# EAGLE board Rapid_Prototype_Schematic (EAGLE 9.6.2)

Size 160 x 100 mm. Coordinates in mm from the lower left corner, seen from the top.
Outline: 0,0 160,0 160,100 0,100 0,0
Copper layers (1*16): Top 0.035mm / dielectric 1.5mm / Bottom 0.035mm
Design rules "default": minimum track width 6mil, minimum drill 0.35mm, track to track 6mil, track to pad 6mil, pad to pad 6mil, via to via 6mil, smd to smd 6mil, copper to edge 40mil, drill to drill 6mil, minimum pad ring 10mil, minimum via ring 8mil, stop-mask expansion 4mil, vias tented up to drill 0mil, thermal gap 10mil

## Footprints (pad centres in the part's own frame; a part is rotated, then mirrored left to right if it is on the bottom)
MEGAOUTLINE = drill 0.8: 0 12.7,24.13; 1 10.16,24.13; 2 7.62,24.13; 3 5.08,24.13; 3V3 -15.24,-24.13; 4 2.54,24.13; 5 0,24.13; 5V -12.7,-24.13; 6 -2.54,24.13; 7 -5.08,24.13; 8 -8.89,24.13; 9 -11.43,24.13; 10 -13.97,24.13; 11 -16.51,24.13; 12 -19.05,24.13; 13 -21.59,24.13; 14 17.78,24.13; 15 20.32,24.13; 16 22.86,24.13; 17 25.4,24.13; 18 27.94,24.13; 19 30.48,24.13; 20 33.02,24.13; 21 35.56,24.13; 22 43.18,21.59; 23 45.72,21.59; 24 43.18,19.05; 25 45.72,19.05; 26 43.18,16.51; 27 45.72,16.51; 28 43.18,13.97; 29 45.72,13.97; 30 43.18,11.43; 31 45.72,11.43; 32 43.18,8.89; 33 45.72,8.89; 34 43.18,6.35; 35 45.72,6.35; 36 43.18,3.81; 37 45.72,3.81; 38 43.18,1.27; 39 45.72,1.27; 40 43.18,-1.27; 41 45.72,-1.27; 42 43.18,-3.81; 43 45.72,-3.81; 44 43.18,-6.35; 45 45.72,-6.35; 46 43.18,-8.89; 47 45.72,-8.89; 48 43.18,-11.43; 49 45.72,-11.43; 50 43.18,-13.97; 51 45.72,-13.97; 52 43.18,-16.51; 53 45.72,-16.51; A0 0,-24.13; A1 2.54,-24.13; A2 5.08,-24.13; A3 7.62,-24.13; A4 10.16,-24.13; A5 12.7,-24.13; A6 15.24,-24.13; A7 17.78,-24.13; A8 22.86,-24.13; A9 25.4,-24.13; A10 27.94,-24.13; A11 30.48,-24.13; A12 33.02,-24.13; A13 35.56,-24.13; A14 38.1,-24.13; A15 40.64,-24.13; AREF -26.67,24.13; GND@1 -24.13,24.13; GND@2 -10.16,-24.13; GND@3 -7.62,-24.13; GND@4 43.18,24.13; GND@5 45.72,24.13; GND@6 43.18,-19.05; GND@7 45.72,-19.05; RESET -17.78,-24.13; VIN -5.08,-24.13
C0603 = smd 1.1 x 1: 1 -0.85,0; 2 0.85,0
C0805 = smd 1.3 x 1.5: 1 -0.85,0; 2 0.85,0
C050-050X075 = drill 0.813 octagon: 1 -2.54,0; 2 2.54,0
C1206 = smd 1.6 x 1.8: 1 -1.4,0; 2 1.4,0
SOD523-M = smd 0.605 x 0.452: 1 -0.852,0; 2 0.852,0
SMASERIES-M = smd 2.565 x 1.651: 1 -1.613,0; 2 1.613,0
DPAK229P990X238-3N = smd 0.97 x 2.83: 1 -2.29,-4.14; 3 2.29,-4.14 | smd 5.63 x 6.09: 4 0,2.51
BOURNS_INC._SMAJ15A_0 = smd 1.27 x 2.1: 1 -1.985,0; 2 1.985,0
DIOM7958X256N = smd 2 x 3.05: 1 -3.6,0; 2 3.6,0
SOD2512X110N = smd 1.03 x 0.52: A 1.15,0; C -1.15,0
FUSM1812X02 = smd 1.9 x 3.4: 1 -1.95,0; 2 1.95,0
SOIC127P600X175-8N = smd 1.525 x 0.7: 1 -2.712,1.905; 2 -2.712,0.635; 3 -2.712,-0.635; 4 -2.712,-1.905; 5 2.712,-1.905; 6 2.712,-0.635; 7 2.712,0.635; 8 2.712,1.905
1X03-CLEANBIG = drill 1.016 pad 1.676: 1 -2.54,0; 2 0,0; 3 2.54,0
CHIPLED_0805 = smd 1.2 x 1.2: A 0,-1.05; C 0,1.05
SOP254P1016X460-4N = smd 2.1 x 1.45: 1 -4.55,1.27; 2 -4.55,-1.27; 3 4.55,-1.27; 4 4.55,1.27
DESD6V8DLP7 = smd 0.4 x 0.25: 1 -0.1,0.225; 2 -0.1,-0.225 | smd 0.4 x 0.7: 3 0.6,0
M0805 = smd 1.3 x 1.6: 1 -0.95,0; 2 0.95,0
R0805 = smd 1.1 x 1.4: 1 -1,0; 2 1,0
R0603 = smd 1 x 1.1: 1 -0.85,0; 2 0.85,0
R1206 = smd 1.6 x 1.803: 1 -1.422,0; 2 1.422,0
MA03-2 = drill 1.016: 1 -2.54,-1.27 | drill 1.016 octagon: 2 -2.54,1.27; 3 0,-1.27; 4 0,1.27; 5 2.54,-1.27; 6 2.54,1.27
MA06-1 = drill 1.016 long: 1 -6.35,0; 2 -3.81,0; 3 -1.27,0; 4 1.27,0; 5 3.81,0; 6 6.35,0
MA04-1 = drill 1.016 long: 1 -3.81,0; 2 -1.27,0; 3 1.27,0; 4 3.81,0
M08A = smd 1.981 x 0.559: 1 -2.464,1.905; 2 -2.464,0.635; 3 -2.464,-0.635; 4 -2.464,-1.905; 5 2.464,-1.905; 6 2.464,-0.635; 7 2.464,0.635; 8 2.464,1.905
TPA08AAA = smd 0.152 x 0.152: A1 -0.5,-0.5; A2 0,-0.5; A3 0.5,0.5; B1 -0.5,0; B3 0,0.5; C1 0.5,0; C2 0.5,-0.5; C3 -0.5,0.5
DCY4 = smd 0.889 x 1.765: 1 -2.311,-3.118; 2 0,-3.118; 3 2.311,-3.118 | smd 3.15 x 1.765: 4 0,3.118
SO-8_S = smd 1.981 x 0.533: 1 -2.464,1.905; 2 -2.464,0.635; 3 -2.464,-0.635; 4 -2.464,-1.905; 5 2.464,-1.905; 6 2.464,-0.635; 7 2.464,0.635; 8 2.464,1.905

## Placement (x,y rotation side)
$2_3_$_2020-06-04_21-52-10  MEGA_DEVICE  [MEGAOUTLINE]  -64.77,27.94 0 top  (outside the outline)
C1  0.1µF  [C0603]  -100.33,116.84 0 top  (outside the outline)
C2  0.1µF  [C0603]  -106.68,116.84 0 top  (outside the outline)
C3  1µF  [C0805]  -121.92,97.79 0 top  (outside the outline)
C4  1µF  [C0805]  -16.51,104.14 0 top  (outside the outline)
C5  1µF  [C0805]  -21.59,104.14 0 top  (outside the outline)
C6  1µF  [C0805]  -26.67,104.14 0 top  (outside the outline)
C7  220µF  [C050-050X075]  -118.11,58.42 0 top  (outside the outline)
C8  220µF  [C050-050X075]  -16.51,74.93 0 top  (outside the outline)
C9  220µF  [C050-050X075]  -25.4,74.93 0 top  (outside the outline)
C10  220µF  [C050-050X075]  -34.29,74.93 0 top  (outside the outline)
C11  100nF  [C0603]  -81.28,116.84 0 top  (outside the outline)
C12  0.1µF  [C0603]  -113.03,116.84 0 top  (outside the outline)
C13  1uF  [C0805]  -40.64,97.79 0 top  (outside the outline)
C14  1µF  [C0805]  -45.72,97.79 0 top  (outside the outline)
C15  1µF  [C0805]  -50.8,97.79 0 top  (outside the outline)
C16  220µF  [C050-050X075]  -43.18,74.93 0 top  (outside the outline)
C17  220uF  [C050-050X075]  -52.07,74.93 0 top  (outside the outline)
C18  220µF  [C050-050X075]  -60.96,74.93 0 top  (outside the outline)
C19  1µF  [C0805]  -55.88,97.79 0 top  (outside the outline)
C20  0.1µF  [C0603]  -119.38,116.84 0 top  (outside the outline)
C21  1µF  [C0603]  -34.29,123.19 0 top  (outside the outline)
C22  1µF  [C0603]  -39.37,123.19 0 top  (outside the outline)
C23  0.1µF  [C0603]  -17.78,123.19 0 top  (outside the outline)
C24  1µF  [C0805]  -60.96,97.79 0 top  (outside the outline)
C25  1µF  [C0805]  -66.04,97.79 0 top  (outside the outline)
C26  1µF  [C0805]  -71.12,97.79 0 top  (outside the outline)
C27  220µF  [C050-050X075]  -69.85,74.93 0 top  (outside the outline)
C28  220µF  [C050-050X075]  -78.74,74.93 0 top  (outside the outline)
C29  22uF  [C1206]  -73.66,91.44 0 top  (outside the outline)
C30  100nf  [C0603]  -24.13,123.19 0 top  (outside the outline)
C31  1.5nf  [C1206]  -80.01,91.44 0 top  (outside the outline)
C32  270nf  [C0603]  -93.98,116.84 0 top  (outside the outline)
C33  10uf  [C0603]  -29.21,123.19 0 top  (outside the outline)
C34  0.1 mf  [C0603]  -87.63,116.84 0 top  (outside the outline)
C35  1µF  [C0805]  -76.2,97.79 0 top  (outside the outline)
C36  1µF  [C0805]  -81.28,97.79 0 top  (outside the outline)
C37  1µF  [C0805]  -86.36,97.79 0 top  (outside the outline)
C38  1µF  [C0805]  -91.44,97.79 0 top  (outside the outline)
C39  1µF  [C0805]  -96.52,97.79 0 top  (outside the outline)
C40  1µF  [C0805]  -101.6,97.79 0 top  (outside the outline)
C41  1µF  [C0805]  -106.68,97.79 0 top  (outside the outline)
CR1  BZT585B16T-7SOD523-M  [SOD523-M]  -99.06,121.92 0 top  (outside the outline)
CR2  16.18V 2%  [SOD523-M]  -105.41,121.92 0 top  (outside the outline)
CR3  SMAJ18ASMASERIES-M  [SMASERIES-M]  -92.71,121.92 0 top  (outside the outline)
CR4  BZT585B16T-7SOD523-M  [SOD523-M]  -111.76,121.92 0 top  (outside the outline)
CR5  16.18V 2%  [SOD523-M]  -118.11,121.92 0 top  (outside the outline)
CR6  16.18V 2%  [SOD523-M]  -15.24,127 0 top  (outside the outline)
CR7  16.18V 2%  [SOD523-M]  -21.59,127 0 top  (outside the outline)
CR8  16.18V 2%  [SOD523-M]  -27.94,127 0 top  (outside the outline)
CR9  16.18V 2%  [SOD523-M]  -34.29,127 0 top  (outside the outline)
D1  MBRD835L  [DPAK229P990X238-3N]  -19.05,63.5 0 top  (outside the outline)
D2  MBRD835L  [DPAK229P990X238-3N]  -30.48,63.5 0 top  (outside the outline)
D3  BOURNS_INC._SMAJ15ABOURNS_INC._SMAJ15A_0_0  [BOURNS_INC._SMAJ15A_0]  -76.2,121.92 0 top  (outside the outline)
D4  MBRS330T3G  [DIOM7958X256N]  -105.41,83.82 0 top  (outside the outline)
D5  CMDSH-3TR  [SOD2512X110N]  -52.07,104.14 0 top  (outside the outline)
F1  MF-MSMF050-2  [FUSM1812X02]  -77.47,59.69 0 top  (outside the outline)
IC1  SI4459ADY-T1-GE3  [SOIC127P600X175-8N]  -120.65,-3.81 0 top  (outside the outline)
IC2  SI4459ADY-T1-GE3  [SOIC127P600X175-8N]  -124.46,-10.16 0 top  (outside the outline)
IC3  SI4459ADY-T1-GE3  [SOIC127P600X175-8N]  -128.27,-16.51 0 top  (outside the outline)
IC4  SI4459ADY-T1-GE3  [SOIC127P600X175-8N]  -132.08,-22.86 0 top  (outside the outline)
IC5  SI4459ADY-T1-GE3  [SOIC127P600X175-8N]  -135.89,-29.21 0 top  (outside the outline)
IC6  SI4459ADY-T1-GE3  [SOIC127P600X175-8N]  -139.7,-35.56 0 top  (outside the outline)
IC7  SI4459ADY-T1-GE3  [SOIC127P600X175-8N]  -143.51,-41.91 0 top  (outside the outline)
IC8  SI4459ADY-T1-GE3  [SOIC127P600X175-8N]  -147.32,-48.26 0 top  (outside the outline)
JP1  J11  [1X03-CLEANBIG]  -83.82,120.65 0 top  (outside the outline)
LED1  YELLOW  [CHIPLED_0805]  -83.82,57.15 0 top  (outside the outline)
LED2  YELLOW  [CHIPLED_0805]  -90.17,57.15 0 top  (outside the outline)
LED3  GREEN  [CHIPLED_0805]  -86.36,73.66 0 top  (outside the outline)
LED4  GREEN  [CHIPLED_0805]  -92.71,73.66 0 top  (outside the outline)
Q1  LTV-8141S  [SOP254P1016X460-4N]  -88.9,90.17 0 top  (outside the outline)
Q3  DMN65D8LFB-7  [DESD6V8DLP7]  -45.72,127 0 top  (outside the outline)
Q5  DMN65D8LFB-7  [DESD6V8DLP7]  -60.96,127 0 top  (outside the outline)
Q7  DMN65D8LFB-7  [DESD6V8DLP7]  -76.2,127 0 top  (outside the outline)
Q9  DMN65D8LFB-7  [DESD6V8DLP7]  -91.44,127 0 top  (outside the outline)
Q11  DMN65D8LFB-7  [DESD6V8DLP7]  -106.68,127 0 top  (outside the outline)
Q13  DMN65D8LFB-7  [DESD6V8DLP7]  -20.32,129.54 0 top  (outside the outline)
Q15  DMN65D8LFB-7  [DESD6V8DLP7]  -35.56,129.54 0 top  (outside the outline)
R1  1MΩ  [M0805]  -16.51,97.79 0 top  (outside the outline)
R2  1MΩ  [M0805]  -22.86,97.79 0 top  (outside the outline)
R3  330  [R0805]  -31.75,104.14 0 top  (outside the outline)
R4  1MΩ  [M0805]  -29.21,97.79 0 top  (outside the outline)
R5  330  [R0805]  -36.83,104.14 0 top  (outside the outline)
R6  330  [R0805]  -41.91,104.14 0 top  (outside the outline)
R7  3.3k  [R0603]  -54.61,110.49 0 top  (outside the outline)
R8  3.3k  [R0603]  -59.69,110.49 0 top  (outside the outline)
R9  3.3k  [R0603]  -64.77,110.49 0 top  (outside the outline)
R10  3.3k  [R0603]  -69.85,110.49 0 top  (outside the outline)
R11  0.005  [R1206]  -35.56,91.44 0 top  (outside the outline)
R12  0.005  [R1206]  -41.91,91.44 0 top  (outside the outline)
R13  0.005  [R1206]  -48.26,91.44 0 top  (outside the outline)
R14  0.005  [R1206]  -54.61,91.44 0 top  (outside the outline)
R15  3.3k  [R0603]  -74.93,110.49 0 top  (outside the outline)
R16  3.3k  [R0603]  -80.01,110.49 0 top  (outside the outline)
R17  3.3k  [R0603]  -85.09,110.49 0 top  (outside the outline)
R18  0.005  [R1206]  -60.96,91.44 0 top  (outside the outline)
R19  0.010Ω  [R1206]  -29.21,91.44 0 top  (outside the outline)
R20  0.005  [R1206]  -67.31,91.44 0 top  (outside the outline)
R21  10k Ω 1%  [M0805]  -114.3,90.17 0 top  (outside the outline)
R22  30.1kΩ 1%  [M0805]  -104.14,90.17 0 top  (outside the outline)
R23  3.3kΩ 1%  [R0603]  -62.23,104.14 0 top  (outside the outline)
R24  3.3kΩ 1%  [R0603]  -72.39,104.14 0 top  (outside the outline)
R25  0.005Ω 1%  [R1206]  -120.65,83.82 0 top  (outside the outline)
R26  0.005Ω 1%  [R1206]  -21.59,91.44 0 top  (outside the outline)
R27  1k Ω  [M0805]  -35.56,97.79 0 top  (outside the outline)
R28  18k  [M0805]  -111.76,97.79 0 top  (outside the outline)
R29  30.1k  [M0805]  -120.65,90.17 0 top  (outside the outline)
R30  1k  [M0805]  -116.84,97.79 0 top  (outside the outline)
R31  10kΩ  [R0603]  -78.74,104.14 0 top  (outside the outline)
R32  1kΩ  [R0603]  -90.17,110.49 0 top  (outside the outline)
R33  10kΩ  [R0603]  -85.09,104.14 0 top  (outside the outline)
R34  1kΩ  [R0603]  -95.25,110.49 0 top  (outside the outline)
R35  10kΩ  [R0603]  -91.44,104.14 0 top  (outside the outline)
R36  1kΩ  [R0603]  -100.33,110.49 0 top  (outside the outline)
R37  10kΩ  [R0603]  -97.79,104.14 0 top  (outside the outline)
R38  1k  [R0603]  -105.41,110.49 0 top  (outside the outline)
R39  10kΩ  [R0603]  -104.14,104.14 0 top  (outside the outline)
R40  1kΩ  [R0603]  -110.49,110.49 0 top  (outside the outline)
R41  10kΩ  [R0603]  -110.49,104.14 0 top  (outside the outline)
R42  1kΩ  [R0603]  -115.57,110.49 0 top  (outside the outline)
R43  10kΩ  [R0603]  -116.84,104.14 0 top  (outside the outline)
R44  1kΩ  [R0603]  -120.65,110.49 0 top  (outside the outline)
R45  10kΩ  [R0603]  -123.19,104.14 0 top  (outside the outline)
R46  1kΩ  [R0603]  -16.51,116.84 0 top  (outside the outline)
R47  10kΩ  [R0603]  -17.78,110.49 0 top  (outside the outline)
R48  1kΩ  [R0603]  -21.59,116.84 0 top  (outside the outline)
R49  10kΩ  [R0603]  -24.13,110.49 0 top  (outside the outline)
R50  1kΩ  [R0603]  -26.67,116.84 0 top  (outside the outline)
R51  10kΩ  [R0603]  -30.48,110.49 0 top  (outside the outline)
R52  1kΩ  [R0603]  -31.75,116.84 0 top  (outside the outline)
R53  10kΩ  [R0603]  -36.83,110.49 0 top  (outside the outline)
R54  1kΩ  [R0603]  -36.83,116.84 0 top  (outside the outline)
R55  10kΩ  [R0603]  -43.18,110.49 0 top  (outside the outline)
R56  1kΩ  [R0603]  -41.91,116.84 0 top  (outside the outline)
R57  10kΩ  [R0603]  -49.53,110.49 0 top  (outside the outline)
R58  1kΩ  [R0603]  -46.99,116.84 0 top  (outside the outline)
SV1  J1  [MA03-2]  -40.64,59.69 0 top  (outside the outline)
SV2  J2  [MA06-1]  -104.14,76.2 0 top  (outside the outline)
SV3  J3  [MA06-1]  -21.59,83.82 0 top  (outside the outline)
SV4  J4  [MA03-2]  -50.8,59.69 0 top  (outside the outline)
SV5  J5  [MA03-2]  -60.96,59.69 0 top  (outside the outline)
SV6  J6  [MA04-1]  -55.88,115.57 0 top  (outside the outline)
SV7  J7  [MA06-1]  -38.1,83.82 0 top  (outside the outline)
SV8  J8  [MA04-1]  -69.85,115.57 0 top  (outside the outline)
SV9  J9  [MA06-1]  -54.61,83.82 0 top  (outside the outline)
SV10  J10  [MA06-1]  -71.12,83.82 0 top  (outside the outline)
U1  LM35DM  [M08A]  -86.36,82.55 0 top  (outside the outline)
U2  LM2904ITPX/NOPB  [TPA08AAA]  -43.18,121.92 0 top  (outside the outline)
U3  LM2904ITPX/NOPB  [TPA08AAA]  -49.53,121.92 0 top  (outside the outline)
U4  LM2904ITPX/NOPB  [TPA08AAA]  -55.88,121.92 0 top  (outside the outline)
U5  LM2904ITPX/NOPB  [TPA08AAA]  -62.23,121.92 0 top  (outside the outline)
U6  LM2904ITPX/NOPB  [TPA08AAA]  -68.58,121.92 0 top  (outside the outline)
U7  TLV1117LV33DCYR  [DCY4]  -109.22,59.69 0 top  (outside the outline)
U8  LT1374IS8-5PBF  [SO-8_S]  -93.98,83.82 0 top  (outside the outline)

## Library data of the parts
$2_3_$_2020-06-04_21-52-10 = ArduinoMegaOutline
C1-C41 JP1 LED1-LED4 R1-R58 = adafruit
CR1 CR2 CR4-CR9 = Diode1; MANUFACTURER_PART_NUMBER: BZT585B16T7; VENDOR: Diodes Inc
CR3 = Diode2; MANUFACTURER_PART_NUMBER: SMAJ18A; VENDOR: Littelfuse Inc
D1 D2 = MBRD835L; AVAILABILITY: Unavailable; DESCRIPTION: Diode Schottky 35V 8A Surface Mount DPAK; MF: Diodes Inc.; MP: MBRD835L-T; PACKAGE: TO-252 Diodes Inc.; PRICE: None
D3 = Bourns Inc. - SMAJ15A; AUTOMOTIVE: No; BREAKDOWN_VOLTAGE: 16.7V; CENTROID_NOT_SPECIFIED: No; CLAMPING_VOLTAGE: 24.4V; DATASHEET: https://www.bourns.com/docs/Product-Datasheets/SMAJ.pdf; DEVICE_CLASS_L1: Circuit Protection; DEVICE_CLASS_L2: TVS Diodes; DEVICE_CLASS_L3: unset; DIGIKEY_DESCRIPTION: DIODE TVS DIODE 15V 24.4V SMA; DIGIKEY_PART_NUMBER: SMAJ15ABCT-ND; DIRECTION: Unidirectional; FOOTPRINT_VARIANT_NAME_0: Recommended_Land_Pattern; HEIGHT: 2.29mm; LEAD_FREE: Yes; MAX_JUNCTION_TEMP: +150°C; MF: Bourns Inc.; MFG_PACKAGE_IDENT: SMA; MFG_PACKAGE_IDENT_COMPONENT_ID: c691c3592a14e60a; MFG_PACKAGE_IDENT_DATE: 0; MFG_PACKAGE_IDENT_REV: 0; MOUSER_DESCRIPTION: Bourns Smaj15a / Diode Tvs 15v 400w Uni 5% Smd Bourns; MOUSER_PART_NUMBER: 652-SMAJ15A; MPN: SMAJ15A; NUMBER_OF_CHANNELS: 1; PACKAGE: SMA; PEAK_PULSE_CURRENT: 16.4A; PEAK_PULSE_POWER: 400W; PREFIX: D; REVERSE_STANDOFF_VOLTAGE: 15V; ROHS: Yes; TEMPERATURE_RANGE_HIGH: +150°C; TEMPERATURE_RANGE_LOW: -55°C; VERIFICATION_VERSION: 0.0.0.3
D4 = MBRS330T3G; HEIGHT: 2.56mm; MANUFACTURER_NAME: ON Semiconductor; MANUFACTURER_PART_NUMBER: MBRS330T3G; MOUSER_PART_NUMBER: 863-MBRS330T3G; MOUSER_PRICE-STOCK: https://www.mouser.com/Search/Refine.aspx?Keyword=863-MBRS330T3G
D5 = CMDSH-3TR; AVAILABILITY: Unavailable; DESCRIPTION: Diode Schottky 30V 100mA Surface Mount SOD-323; MF: Central Semiconductor; MP: CMDSH-3 TR; PACKAGE: SOD-323 Central Semiconductor; PRICE: None
F1 = MF-MSMF050-2; AVAILABILITY: Unavailable; DESCRIPTION: Polymeric PTC Resettable Fuse 15V 500mA Ih Surface Mount 1812 _4532 Metric_, Concave; MF: Bourns; MP: MF-MSMF050-2; PACKAGE: 1812 Bourns; PRICE: None
IC1-IC8 = SI4459ADY-T1-GE3; DESCRIPTION: Trans MOSFET P-CH 30V 29A 8-Pin SOIC N T/R; HEIGHT: 1.75mm; MANUFACTURER_NAME: Vishay; MANUFACTURER_PART_NUMBER: SI4459ADY-T1-GE3; MOUSER_PART_NUMBER: 781-SI4459ADY-T1-GE3; MOUSER_PRICE-STOCK: https://www.mouser.co.uk/ProductDetail/Vishay-Semiconductors/SI4459ADY-T1-GE3?qs=IRuQNBqMOcnyBuDcl66N0Q%3D%3D
Q1 = LTV-8141S; DESCRIPTION: Transistor Output Optocouplers Optocoupler AC input; HEIGHT: 4.6mm; MANUFACTURER_NAME: Lite-On; MANUFACTURER_PART_NUMBER: LTV-8141S; MOUSER_PART_NUMBER: 859-LTV-8141S; MOUSER_PRICE-STOCK: https://www.mouser.co.uk/ProductDetail/Lite-On/LTV-8141S?qs=9PJrLaO2oWUf6ygS0H3swQ%3D%3D
Q3 Q5 Q7 Q9 Q11 Q13 Q15 = DMN65D8LFB-7; DESCRIPTION: MOSFET 60V N-Ch Dual Enh 20Vgss 300mW Pd; HEIGHT: 0.53mm; MANUFACTURER_NAME: Diodes Inc.; MANUFACTURER_PART_NUMBER: DMN65D8LFB-7; MOUSER_PART_NUMBER: 621-DMN65D8LFB-7; MOUSER_PRICE-STOCK: https://www.mouser.com/Search/Refine.aspx?Keyword=621-DMN65D8LFB-7
SV1-SV10 = con-lstb; OC_FARNELL: unknown; OC_NEWARK: unknown
U1 = LM35DM; BUILT_BY: EMA_UL_Team; MANUFACTURER_PART_NUMBER: LM35DM; VENDOR: Texas Instruments
U2-U6 = Opamp1; MANUFACTURER_PART_NUMBER: LM2904ITPXNOPB; VENDOR: Texas Instruments
U7 = TLV1117LV33DCYR; BUILT_BY: EMA_UL_Team; MANUFACTURER: Texas Instruments; MANUFACTURER_PART_NUMBER: TLV1117LV33DCYR; VENDOR: Texas Instruments
U8 = LT1374IS8-5PBF; AVAILABILITY: Unavailable; DESCRIPTION: Buck, SEPIC Switching Regulator IC Positive Fixed 5V 1 Output 4.5A _Switch_ 8-SOIC _0.154, 3.90mm Width_; MF: Linear Technology; MP: LT1374IS8-5#PBF; PACKAGE: SO-8 Linear Technology; PRICE: None

## Nets
5V: C1.1 C2.1 C11.1 C12.1 C23.1 C34.1 CR1.1 D5.A IC8.1 IC8.2 IC8.3 IC8.5 IC8.6 IC8.7 IC8.8 R1.2 R2.2 R4.2 R29.2 U1.8 U2.A2 U3.A2 U4.A2 U5.A2 U6.A2 U8.3 U8.5
+3V3: C26.1 LED2.A SV5.5 SV5.6 U7.2 U7.4
+5V: C19.1 R27.2 SV6.4 SV8.4 U7.3
BATT_VOLTAGE: $2_3_$_2020-06-04_21-52-10.A8 C20.1 R21.2 R22.1
BTMP: $2_3_$_2020-06-04_21-52-10.A10 U1.1
COMBINED_POWER: C27.1 C28.1 C36.1 CR3.1 CR4.1 IC2.1 IC2.2 IC2.3 R25.2 R26.2 R35.2 U6.B1 U6.B3
CTLD_ELEC_PWR: R19.1 R22.2 U4.C3
ELEC_CURR: $2_3_$_2020-06-04_21-52-10.A9 C13.1 R15.1
ESC_MAIN_POWER_SW: $2_3_$_2020-06-04_21-52-10.31 R36.1
ESC_PA_POWER: C9.1 C35.1 CR2.1 IC7.1 IC7.2 IC7.3 R13.2 R31.2 U2.B3
ESC_PF_POWER: C18.1 C40.1 CR8.1 IC3.1 IC3.2 IC3.3 R20.2 R51.2 U5.B3
ESC_POWER: IC2.5 IC2.6 IC2.7 IC2.8 R11.1 R12.1 R13.1 R14.1 R18.1 R20.1 U2.C1 U2.C3 U3.C1 U3.C3 U5.C1 U5.C3
ESC_POWER1: D1.4 D2.4 R25.1 R26.1 U6.C1 U6.C3
ESC_PV_POWER: C10.1 C39.1 CR7.1 IC5.1 IC5.2 IC5.3 R14.2 R47.2 U3.B3
ESC_SA_POWER: C7.1 C41.1 CR9.1 IC4.1 IC4.2 IC4.3 R11.2 R55.2 U2.B1
ESC_SF_POWER: C16.1 C38.1 CR6.1 IC1.1 IC1.2 IC1.3 R18.2 R43.2 U5.B1
ESC_SV_POWER: C8.1 C37.1 CR5.1 IC6.1 IC6.2 IC6.3 R12.2 R39.2 U3.B1
ESCPA_CURR: $2_3_$_2020-06-04_21-52-10.A4 C3.1 R7.1
ESCPA_POWER: IC7.5 IC7.6 IC7.7 IC7.8 SV3.5
ESCPA_PWM: $2_3_$_2020-06-04_21-52-10.12 SV10.1
ESCPA_SWITCH: $2_3_$_2020-06-04_21-52-10.33 R32.1
ESCPF_CURR: $2_3_$_2020-06-04_21-52-10.A2 C14.1 R16.1
ESCPF_POWER: IC3.5 IC3.6 IC3.7 IC3.8 SV3.3
ESCPF_PWM: $2_3_$_2020-06-04_21-52-10.8 SV10.4
ESCPF_SWITCH: $2_3_$_2020-06-04_21-52-10.35 R52.1
ESCPV_CURR: $2_3_$_2020-06-04_21-52-10.A0 C4.1 R8.1
ESCPV_POWER: IC5.5 IC5.6 IC5.7 IC5.8 SV3.4
ESCPV_PWM: $2_3_$_2020-06-04_21-52-10.6 SV10.6
ESCPV_SWITCH: $2_3_$_2020-06-04_21-52-10.34 $2_3_$_2020-06-04_21-52-10.37 R48.1
ESCSA_CURR: $2_3_$_2020-06-04_21-52-10.A5 C5.1 R9.1
ESCSA_POWER: IC4.5 IC4.6 IC4.7 IC4.8 SV3.6
ESCSA_PWM: $2_3_$_2020-06-04_21-52-10.9 SV10.3
ESCSA_SWITCH: $2_3_$_2020-06-04_21-52-10.32 R56.1
ESCSF_CURR: $2_3_$_2020-06-04_21-52-10.A3 C15.1 R17.1
ESCSF_POWER: SV3.1
ESCSF_PWM: $2_3_$_2020-06-04_21-52-10.11 SV10.2
ESCSF_SWITCH: R44.1
ESCSV_CURR: $2_3_$_2020-06-04_21-52-10.A1 C6.1 R10.1
ESCSV_POWER: IC6.5 IC6.6 IC6.7 IC6.8 SV3.2
ESCSV_PWM: $2_3_$_2020-06-04_21-52-10.7 SV10.5
ESCSV_SWITCH: $2_3_$_2020-06-04_21-52-10.36 R40.1
GND: $2_3_$_2020-06-04_21-52-10.GND@1 $2_3_$_2020-06-04_21-52-10.GND@2 $2_3_$_2020-06-04_21-52-10.GND@3 $2_3_$_2020-06-04_21-52-10.GND@4 $2_3_$_2020-06-04_21-52-10.GND@5 $2_3_$_2020-06-04_21-52-10.GND@6 $2_3_$_2020-06-04_21-52-10.GND@7 C1.2 C2.2 C3.2 C4.2 C5.2 C6.2 C7.2 C8.2 C9.2 C10.2 C11.2 C12.2 C13.2 C14.2 C15.2 C16.2 C17.2 C18.2 C19.2 C20.2 C21.2 C22.2 C23.2 C24.2 C25.2 C26.2 C27.2 C28.2 C29.2 C31.2 C33.2 C34.2 CR3.2 D3.2 D4.2 LED1.C LED3.C LED4.C Q1.3 Q3.2 Q5.2 Q7.2 Q9.2 Q11.2 Q13.2 Q15.2 R21.1 R33.1 R37.1 R41.1 R45.1 R49.1 R53.1 R57.1 SV2.1 SV2.2 SV2.3 SV2.4 SV2.5 SV2.6 SV4.1 SV4.3 SV4.5 SV5.1 SV6.3 SV7.1 SV7.2 SV7.3 SV7.4 SV7.5 SV7.6 SV8.3 U1.4 U2.C2 U3.C2 U4.C2 U5.C2 U6.C2 U7.1 U8.4
LK_DET_MAIN: $2_3_$_2020-06-04_21-52-10.19 R1.1 SV4.6
LK_DET_P_BAT: $2_3_$_2020-06-04_21-52-10.18 R2.1 SV4.4
LK_DET_S_BAT: $2_3_$_2020-06-04_21-52-10.2 R4.1 SV4.2
N$1: R8.2 U3.A3
N$2: R16.2 U5.A3
N$3: U8.8
N$4: C31.1 U8.6
N$5: R10.2 U3.A1
N$6: IC1.5 IC1.6 IC1.7 IC1.8
N$7: R17.2 U5.A1
N$8: C32.2 D4.1
N$9: R7.2 U2.A3
N$10: Q3.1 R32.2 R33.2
N$11: R9.2 U2.A1
N$13: C35.2 CR2.2 IC7.4 R31.1 R34.2
N$14: C36.2 CR4.2 IC2.4 R35.1 R38.2
N$15: Q5.3 R38.1
N$16: Q1.1 R28.1
N$17: Q5.1 R36.2 R37.2
N$18: Q3.3 R34.1
N$19: C37.2 CR5.2 IC6.4 R39.1 R42.2
N$20: Q7.1 R40.2 R41.2
N$21: Q7.3 R42.1
N$22: C39.2 CR7.2 IC5.4 R47.1 R50.2
N$23: Q11.1 R48.2 R49.2
N$24: Q11.3 R50.1
N$25: C41.2 CR9.2 IC4.4 R55.1 R58.2
N$26: Q15.1 R56.2 R57.2
N$27: Q15.3 R58.1
N$28: C40.2 CR8.2 IC3.4 R51.1 R54.2
N$29: Q13.1 R52.2 R53.2
N$30: Q13.3 R54.1
N$31: C38.2 CR6.2 IC1.4 R43.1 R46.2
N$32: Q9.1 R44.2 R45.2
N$33: Q9.3 R46.1
N$34: R23.2 U6.A3
N$35: R24.2 U6.A1
N$36: R15.2 U4.A3
N$37: C29.1 D3.1 F1.2 U8.1
N$38: C32.1 D5.C U8.2
N$39: LED4.A R27.1
N$43: CR1.2 IC8.4 R29.1 R30.1
N$44: C33.1 Q1.4 R30.2
N$48: C30.1 R28.2
N$50: $2_3_$_2020-06-04_21-52-10.20 SV6.1 SV8.1
N$51: $2_3_$_2020-06-04_21-52-10.21 SV6.2 SV8.2
N$53: R3.1 SV5.4
N$54: LED2.C R5.2
N$55: R5.1 SV5.2
N$56: LED1.A R3.2
N$57: R6.1 SV5.3
N$58: LED3.A R6.2
P_BATT+: C21.1 D1.1 D1.3
PORT_BAT_CURR: $2_3_$_2020-06-04_21-52-10.A6 C24.1 R23.1
S_BATT+: C22.1 D2.1 D2.3
STBD_BAT_CURR: $2_3_$_2020-06-04_21-52-10.A7 C25.1 R24.1
TETHER_A: JP1.1 SV1.1 SV1.2
TETHER_B: C30.2 JP1.3 Q1.2 SV1.5 SV1.6
TRONICS_POWER: C17.1 F1.1 R19.2 U4.B3

## Tracks (layer width: path | path; a pad name or v marks a point on that pad's centre or on a via)
5V  (26 unrouted)
+3V3  (5 unrouted)
+5V  (4 unrouted)
BATT_VOLTAGE  (3 unrouted)
BTMP  (1 unrouted)
COMBINED_POWER  (12 unrouted)
CTLD_ELEC_PWR  (2 unrouted)
ELEC_CURR  (2 unrouted)
ESC_MAIN_POWER_SW  (1 unrouted)
ESC_PA_POWER  (8 unrouted)
ESC_PF_POWER  (8 unrouted)
ESC_POWER  (15 unrouted)
ESC_POWER1  (5 unrouted)
ESC_PV_POWER  (8 unrouted)
ESC_SA_POWER  (8 unrouted)
ESC_SF_POWER  (8 unrouted)
ESC_SV_POWER  (8 unrouted)
ESCPA_CURR  (2 unrouted)
ESCPA_POWER  (4 unrouted)
ESCPA_PWM  (1 unrouted)
ESCPA_SWITCH  (1 unrouted)
ESCPF_CURR  (2 unrouted)
ESCPF_POWER  (4 unrouted)
ESCPF_PWM  (1 unrouted)
ESCPF_SWITCH  (1 unrouted)
ESCPV_CURR  (2 unrouted)
ESCPV_POWER  (4 unrouted)
ESCPV_PWM  (1 unrouted)
ESCPV_SWITCH  (2 unrouted)
ESCSA_CURR  (2 unrouted)
ESCSA_POWER  (4 unrouted)
ESCSA_PWM  (1 unrouted)
ESCSA_SWITCH  (1 unrouted)
ESCSF_CURR  (2 unrouted)
ESCSF_PWM  (1 unrouted)
ESCSV_CURR  (2 unrouted)
ESCSV_POWER  (4 unrouted)
ESCSV_PWM  (1 unrouted)
ESCSV_SWITCH  (1 unrouted)
GND  (86 unrouted)
LK_DET_MAIN  (2 unrouted)
LK_DET_P_BAT  (2 unrouted)
LK_DET_S_BAT  (2 unrouted)
N$1  (1 unrouted)
N$2  (1 unrouted)
N$4  (1 unrouted)
N$5  (1 unrouted)
N$6  (3 unrouted)
N$7  (1 unrouted)
N$8  (1 unrouted)
N$9  (1 unrouted)
N$10  (2 unrouted)
N$11  (1 unrouted)
N$13  (4 unrouted)
N$14  (4 unrouted)
N$15  (1 unrouted)
N$16  (1 unrouted)
N$17  (2 unrouted)
N$18  (1 unrouted)
N$19  (4 unrouted)
N$20  (2 unrouted)
N$21  (1 unrouted)
N$22  (4 unrouted)
N$23  (2 unrouted)
N$24  (1 unrouted)
N$25  (4 unrouted)
N$26  (2 unrouted)
N$27  (1 unrouted)
N$28  (4 unrouted)
N$29  (2 unrouted)
N$30  (1 unrouted)
N$31  (4 unrouted)
N$32  (2 unrouted)
N$33  (1 unrouted)
N$34  (1 unrouted)
N$35  (1 unrouted)
N$36  (1 unrouted)
N$37  (3 unrouted)
N$38  (2 unrouted)
N$39  (1 unrouted)
N$43  (3 unrouted)
N$44  (2 unrouted)
N$48  (1 unrouted)
N$50  (2 unrouted)
N$51  (2 unrouted)
N$53  (1 unrouted)
N$54  (1 unrouted)
N$55  (1 unrouted)
N$56  (1 unrouted)
N$57  (1 unrouted)
N$58  (1 unrouted)
P_BATT+  (2 unrouted)
PORT_BAT_CURR  (2 unrouted)
S_BATT+  (2 unrouted)
STBD_BAT_CURR  (2 unrouted)
TETHER_A  (2 unrouted)
TETHER_B  (4 unrouted)
TRONICS_POWER  (3 unrouted)